# Altium PCB blueduino-r2.PcbDoc
Units mm, origin at the board's own origin, x right, y up, seen from the top; angles counter-clockwise.
Board outline 40.15 x 18.15 mm, 2 copper layers (Top Layer, Bottom Layer); 26 components, 55 nets, 147 pads, 59 vias.
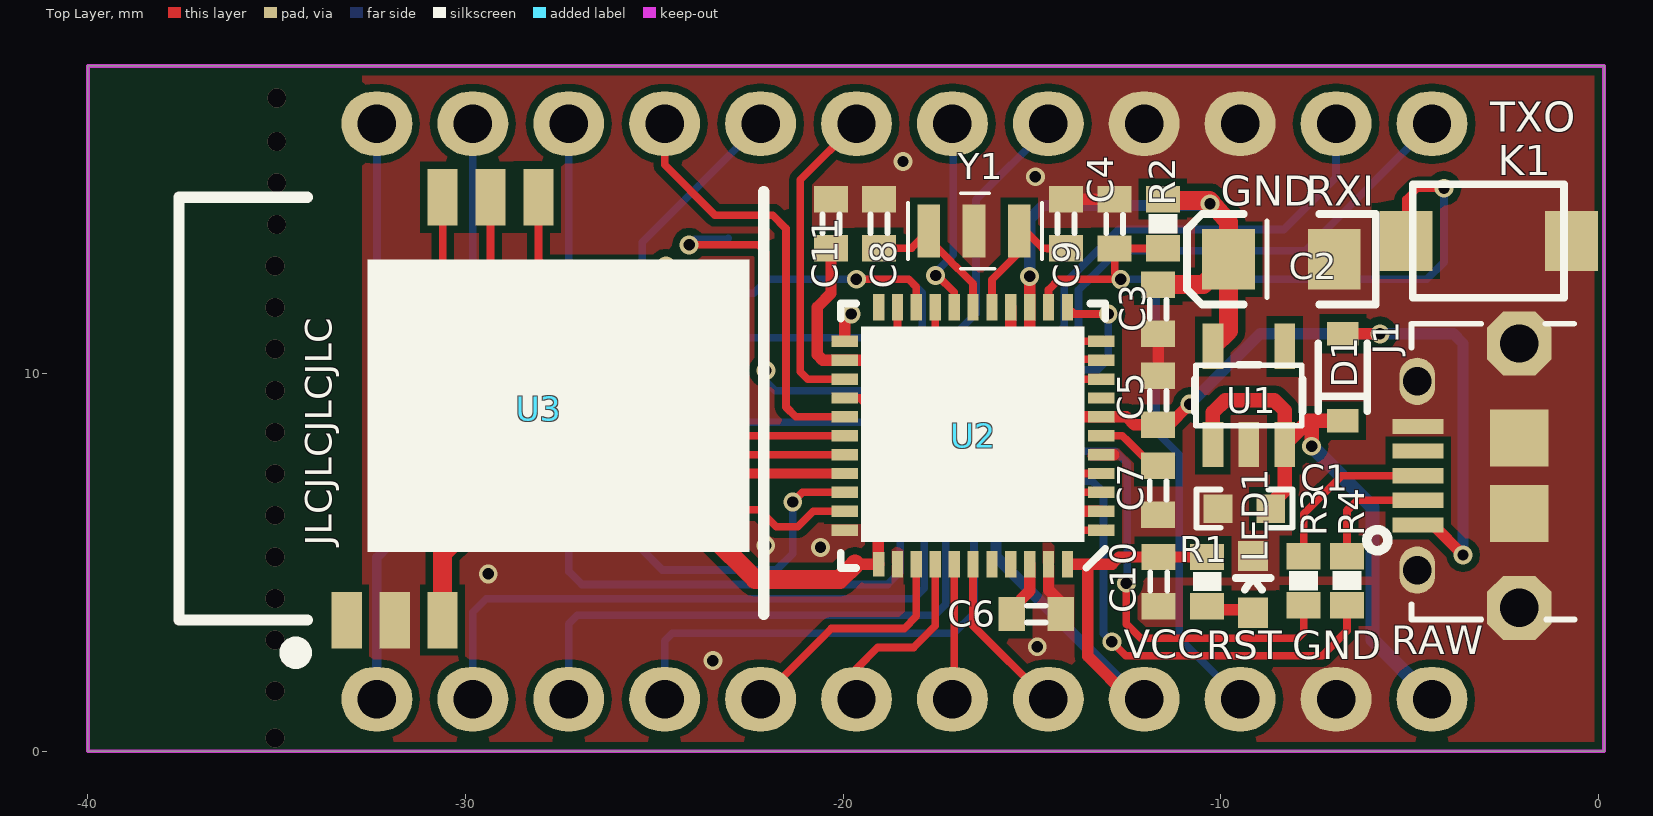
[diagram p0: Top Layer view]
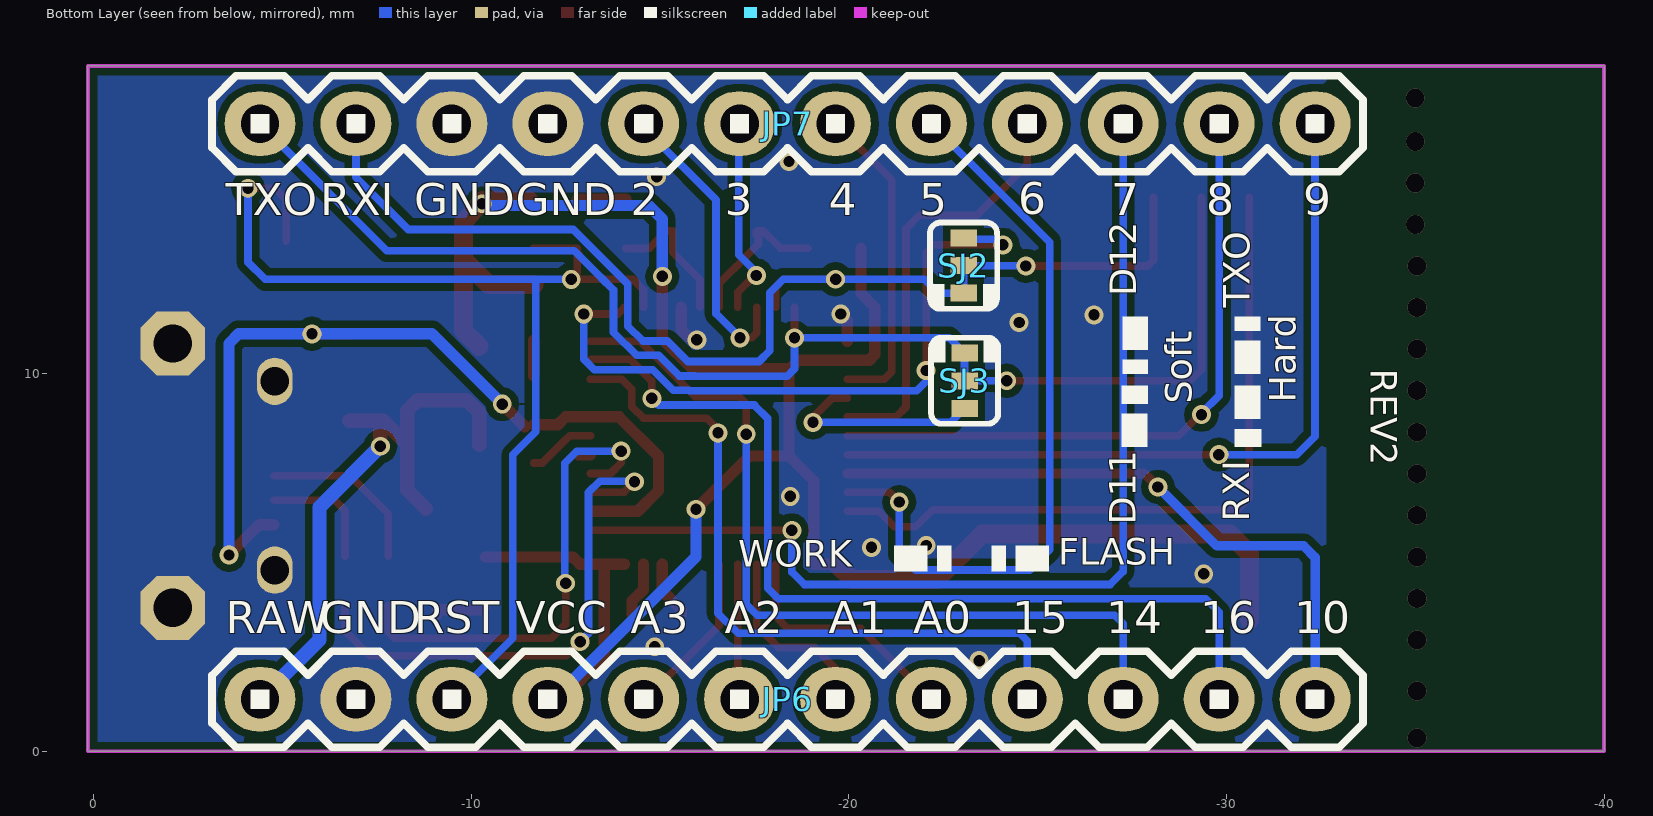
[diagram p1: Bottom Layer view, seen from below]

## Layer stack, top to bottom
Top Layer: signal copper 0.0356
Dielectric: dielectric 0.32, FR-4, Dk 4.8
Bottom Layer: signal copper 0.0356

## Board outline
-40,0 -40,18.15 0.15,18.15 0.15,0

## Design rules (kind name [scope] priority, off if disabled: settings)
Clearance Clearance_gnd [InNet('GND')] p1: gap=0.2
Clearance [All] p2: gap=0.178
DiffPairsRouting [All] p1: maxlimit=0.254 minlimit=0.254 mostfreqgap=0.254 maxuncoupledlength=12.7
FabricationTestPointUsage TestPointUsage [All] p1: valid=0 allowmultiple=FALSE
FabricationTestpoint Testpoint [All] p1: side=3 testpointundercomponent=TRUE minsize=1.016 maxsize=2.54 preferedsize=1.524 minholesize=0 maxholesize=1.016 preferedholesize=0.813 testpointgrid=0.025 allowsidetop=TRUE allowsidebottom=TRUE usegrid=TRUE gridtolerance=0
HoleSize [All] p1: absolutevalues=TRUE maxlimit=2.54 minlimit=0.3 maxpercent=80.000 minpercent=20.000
HoleToHoleClearance [All] p1: gap=0.152 allowstackedmicrovias=TRUE
PlaneConnect [All] p1: planeconnectstyle=Direct reliefexpansion=0.508 reliefentries=4 reliefconductorwidth=0.254 reliefairgap=0.254
PolygonConnect [All] p1: connectstyle=Direct reliefconductorwidth=0.254 reliefentries=4 polygonreliefangle="90 Angle"
RoutingVias [All] p1: holewidth=0.3 width=0.5 viastyle="Through Hole" minholewidth=0.3 minwidth=0.5 maxholewidth=0.711 maxwidth=1.27
SilkscreenOverComponentPads [IsPad] p1: minsilkscreentomaskgap=0.254
SolderMaskExpansion [All] p1: expansion=0
Width [All] p1: maxlimit=0.5 minlimit=0.09 preferedwidth=0.203 bottomlayer_minwidth=0.203 minimp=50.000000 maximp=50.000000 favimp=50.000000
21 further rules are at their usual default settings.

## Classes and differential pairs
differential pair USB_Data: +D+ -D-

## Components (designator, comment, footprint, x,y, rotation, side; value= is the part's Value field where it differs from the comment)
C1 "10uF" 0603C -9.373,6.426 r180 top
C2 "10uF" EIA3216 -8.395,13.03 r180 top (schematic designator C13)
C3 "0.1uF" 0402-CAP -11.659,11.709 r90 top (schematic designator C7)
C4 "0.1UF" 0402-CAP -12.812,13.966 r270 top (schematic designator C10)
C5 "1uF" 0402-CAP -11.659,9.296 r270 top (schematic designator C6)
C6 "0.1uF" 0402-CAP -14.884,3.632 r180 top (schematic designator C1)
C7 "1uF" 0402-CAP -11.659,6.909 r90 top (schematic designator C5)
C8 "22pF" 0402-CAP -19.05,13.97 r90 top (schematic designator C2)
C9 "22pF" 0402-CAP -14.097,13.97 r90 top (schematic designator C4)
C10 "1uF" 0402-CAP -11.643,4.496 r270 top
C11 "0.1uF" 0402-CAP -20.32,13.97 r270 top (schematic designator C3)
D1 "B5819WS" SOD-323 -6.769,9.906 r90 top (schematic designator D2)
J1 "Comment" FCI_10118194-0001 -3.696,7.298 r90 top
JP6 "*" 1X12 -4.407,1.38 r180 bottom locked
JP7 "*" 1X12 -32.347,16.62 r0 bottom locked
LED1 "Red" LED-0603 -9.144,4.42 r0 top
R1 "1K" 0402-RES -10.363,4.496 r90 top (schematic designator R11)
R2 "10K" 0402-RES -11.532,13.97 r90 top
R3 "22" 0402-RES -7.807,4.517 r90 top (schematic designator R5)
R4 "22" 0402-RES -6.657,4.517 r90 top (schematic designator R7)
SJ2 "SW-SPDT" "SJ_3 - S" -23.039,12.861 r90 bottom
SJ3 "SW-SPDT" "SJ_3 - S" -23.064,9.813 r270 bottom
U1 "MIC5219-3.3BM5" SOT23-5 -9.258,9.423 r0 top (schematic designator U2)
U2 "ATMEGA32U4" QFN-44-NOPAD -16.561,8.357 r180 top (schematic designator U3)
U3 "AB01" CC2540-MINI -28.067,9.075 r180 top
Y1 "8Mhz" OSCCC250X320X80-4L -16.434,12.929 r180 top

## Footprints (in the part's own frame and the unit in brackets; to place one, negate y for a bottom-side part, rotate by r counter-clockwise, add the part's x,y. Pads: shape width x height; smd on the part's side, far side on the other; paste and mask are expansions set on the pad)
1X12 [mm]
  oval 1.88x1.7 hole 1.016: 1(0,0) 2(2.54,0) 3(5.08,0) 4(7.62,0) 5(10.16,0) 6(12.7,0) 7(15.24,0) 8(17.78,0) 9(20.32,0) 10(22.86,0) 11(25.4,0) 12(27.94,0)
  silkscreen extent -1.27,-1.27 29.21,1.27
0402-CAP [mm]
  rect 0.7x0.9 smd: 1(-0.65,0) 2(0.65,0)
  silkscreen extent -0.25,-0.22 0.25,0.22
0402-RES [mm]
  rect 0.7x0.9 smd: 1(-0.65,0) 2(0.65,0)
  silkscreen extent -0.25,-0.39 0.25,0.38
0603C [mil]
  rect 30x30 smd: 1(27.5,0) 2(-27.5,0)
  silkscreen extent -50,-20 50,20
CC2540-MINI [mm]
  rect 0.8x1.5 smd: 1(5.08,5.6) 2(3.81,5.6) 3(2.54,5.6) 14(0,-5.6) 15(1.27,-5.6)
  rect 0.8x1.5 on Top Overlay: 4(1.27,5.6) 5(0,5.6) 6(-1.27,5.6) 7(-2.54,5.6) 8(-3.81,5.6) 9(-5.08,5.6) 10(-5.08,-5.6) 11(-3.81,-5.6) 12(-2.54,-5.6) 13(-1.27,-5.6) 17(3.81,-5.6) 18(5.08,-5.6)
  silkscreen extent -5.96,-5.75 9.52,6.64
EIA3216 [mm]
  rect 1.4x1.6 smd: A(1.4,0) C(-1.4,0)
  silkscreen extent -2.5,-1.2 2.5,1.2
FCI_10118194-0001 [mm] "FCI_10118194-0001"
  rect 0.4x1.35 smd: 1(-1.3,1.077) 2(-0.65,1.077) 3(0,1.077) 4(0.65,1.077) 5(1.3,1.077)
  oval 1.25x0.95 hole 0.76: G1(-2.5,1.102) G2(2.5,1.102)
  oct 1.7x1.7 hole 1.016: G3(-3.5,-1.598) G6(3.5,-1.598)
  rect 1.5x1.55 smd: G4(-1,-1.598) G5(1,-1.598)
  silkscreen extent -3.81,-3.06 4.03,2.44
LED-0603 [mm]
  rect 0.8x0.8 smd: A(0,-0.75) C(0,0.75)
  silkscreen extent -0.46,-0.14 0.46,0.17
OSCCC250X320X80-4L [mm] "OSCCC250X320X80-4L"
  rect 0.6x1.4 smd paste-0.055 mask+0.075: 1(-1.1,-0.85) 2(0.1,-0.85) 3(1.3,-0.85)
  silkscreen extent -1.7,-1.85 1.85,0.15
QFN-44-NOPAD [mm]
  rect 0.7x0.3 smd mask+0.05: 1(-3.4,2.5) 2(-3.4,2) 3(-3.4,1.5) 4(-3.4,1) 5(-3.4,0.5) 6(-3.4,0) 7(-3.4,-0.5) 8(-3.4,-1) 9(-3.4,-1.5) 10(-3.4,-2) 11(-3.4,-2.5) 23(3.4,-2.5) 24(3.4,-2) 25(3.4,-1.5) 26(3.4,-1) 27(3.4,-0.5) 28(3.4,0) 29(3.4,0.5) 30(3.4,1) 31(3.4,1.5) 33(3.4,2.5)
  rect 0.3x0.7 smd mask+0.05: 12(-2.5,-3.4) 13(-2,-3.4) 14(-1.5,-3.4) 15(-1,-3.4) 16(-0.5,-3.4) 17(0,-3.4) 18(0.5,-3.4) 19(1,-3.4) 20(1.5,-3.4) 21(2,-3.4) 22(2.5,-3.4) 35(2,3.4) 36(1.5,3.4) 37(1,3.4) 38(0.5,3.4) 39(0,3.4) 40(-0.5,3.4) 41(-1,3.4) 42(-1.5,3.4) 43(-2,3.4) 44(-2.5,3.4)
  rect 0.7x0.3 smd paste+0 mask+0.05: 32(3.4,2)
  rect 0.3x0.65 smd mask+0.05: 34(2.5,3.4)
  silkscreen extent -3.5,-3.5 3.5,3.5
"SJ_3 - S" [mm]
  rect 0.45x0.7 smd: 1(-0.73,0) 2(0,0) 3(0.73,0)
  silkscreen extent -1.15,-0.89 1.14,0.89
SOD-323 [mm]
  rect 0.63x0.83 smd: 1(-1.15,0) 2(1.15,0)
  silkscreen extent -0.9,-0.65 0.9,0.65
SOT23-5 [mm]
  rect 0.55x1.2 smd: 1(-0.95,-1.3) 2(0,-1.3) 3(0.95,-1.3) 4(0.95,1.3) 5(-0.95,1.3)
  silkscreen extent -1.42,-0.8 1.42,0.81

## Part data
C2: library part CAP_POL1206
C3 C4 C5 C6 C7 C8 C9 C10 C11: library part CAP0402-CAP
D1: library part DIODESOD
JP6 JP7: library part M12PTH
LED1: library part LED0603
R1 R2 R3 R4: library part RESISTOR0402-RES
SJ2 SJ3: "SPDT Subminiature Toggle Switch, Right Angle Mounting, Vertical Actuation"
U1: library part V_REG_LDOSMD
U2: library part ATMEGA32U4QFN2

## Free pads (board coordinates)
  rect 0.8x1.5 smd: 0(-30.607,14.675)
  rect 1.4x1.6 smd: 2(-5.1,13.513) 2(-0.711,13.513)

## Via types
v1: diameter 0.5, hole 0.3, Top Layer to Bottom Layer, 43 vias
v2: diameter 0.5, hole 0.5, Top Layer to Bottom Layer, 16 vias

## Nets (pads, with @x,y where several pads share a name; then routed paths per layer and width w, separated by ;. In a path a pad name is that pad's centre, name@x,y a point inside that pad or via, vN(x,y) a via of type N, cw(c..) or ccw(c..) an arc to the next point about the centre after c; other vN are vias at no path point)
A0: JP6.8 U2.36 | length 6.4
  Top Layer w0.203: JP6.8 -20.317,3.25 -18.384,3.25 -18.061,3.573 U2.36
A1: JP6.7 U2.37 | length 5
  Top Layer w0.203: JP6.7 -19.647,2.187 -19.084,2.75 -18.134,2.75 -17.561,3.323 U2.37
A2: JP6.6 U2.38 | length 3.8
  Top Layer w0.203: JP6.6 -17.061,1.426 U2.38
  Bottom Layer w0.203: JP6.6 JP6.6@-17.107,1.577
A3: JP6.5 U2.39 | length 4.7
  Top Layer w0.203: U2.39 -16.561,3.327 -14.614,1.38 JP6.5
  Bottom Layer w0.203: JP6.5 JP6.5@-14.567,1.667
A4: U2.40
A5: U2.41
AREF: C6.2 U2.42 | length 1.5
  Top Layer w0.3: C6.2@-15.56,3.632 -15.56,3.751 -15.061,4.25 U2.42
D2: JP7.8 U2.19 | length 7.9
  Top Layer w0.203: U2.19 -17.561,11.084 -17.424,10.947 v1(-17.12,10.947)
  Bottom Layer w0.203: v1(-17.12,10.947) -16.484,11.583 -16.484,14.6 -14.567,16.517 JP7.8
D3: JP7.7 U2.18 | length 5.5
  Top Layer w0.203: v1@-17.654,12.58 v1@-17.534,12.58 ; v1(-17.55,12.6) v1@-17.544,12.6 ; U2.18 -17.061,12.152 v1@-17.489,12.58 ; v1@-17.544,12.6 -17.534,12.61 v1@-17.534,12.6 ; v1@-17.544,12.6 v1@-17.534,12.6 ; v1@-17.534,12.58 v1@-17.534,12.6 ; v1@-17.534,12.58 v1@-17.489,12.58 ; v1@-17.534,12.6 -17.509,12.6 v1@-17.489,12.58
  Bottom Layer w0.203: v1@-17.534,12.58 -17.534,12.7 -17.084,13.15 -17.084,16.597 JP7.7
D4: JP7.6 U2.25 | length 8.4
  Top Layer w0.203: U2.25 -20.94,9.856 -21.133,10.049 -21.133,11.17 -21.133,15.134 JP7.6
D5: JP7.5 U2.31 | length 19.9
  Top Layer w0.203: v1@-21.384,6.55 v1(-21.334,6.6) -21.077,6.857 U2.31
  Bottom Layer w0.203: JP7.5 -25.324,13.483 -25.324,5.334 -24.79,4.801 -21.768,4.801 -21.334,5.235 v1(-21.334,6.6)
D6: JP7.4 U2.27 | length 12.1
  Top Layer w0.203: JP7.4@-24.727,16.507 JP7.4 ; JP7.4@-24.659,16.688 JP7.4 ; JP7.4@-24.189,16.62 JP7.4 ; U2.27 -21.252,8.856 -21.514,9.119 -21.514,13.843 -21.869,14.199 -23.393,14.199 -24.727,15.532 JP7.4
D7: JP7.3 U2.1 | length 27.3
  Top Layer w0.203: v1(-18.49,5.85) U2.1
  Bottom Layer w0.203: JP7.3 -27.267,4.763 -26.924,4.42 -18.821,4.42 -18.49,4.751 v1(-18.49,5.85)
D8: JP7.2 U2.28 | length 17.5
  Top Layer w0.203: v1@-29.318,8.934 -28.74,8.356 U2.28
  Bottom Layer w0.203: JP7.2 -29.807,9.423 v1@-29.318,8.934
  other v1: -29.337,8.915
D9: JP7.1 U2.29 | length 21
  Top Layer w0.203: JP7.1 JP7.1@-32.259,16.62 ; v1(-29.8,7.857) U2.29
  Bottom Layer w0.203: JP7.1 -32.347,8.347 -31.857,7.857 v1(-29.8,7.857)
D10: JP6.12 U2.30 | length 17.2
  Top Layer w0.254: JP6.12 JP6.12@-32.223,1.38 ; v1(-28.184,7) -27.827,7.357 U2.30
  Bottom Layer w0.254: JP6.12 -32.347,5.137 -32.04,5.444 -29.74,5.444 v1(-28.184,7)
D11: SJ2.3 U2.12 | length 18.2
  Top Layer w0.203: v1(-24.079,13.411) -22.25,13.411 -22.047,13.208 v1(-22.047,10.084) ; U2.12 -13.887,11.582 v1@-13.03,11.582
  Bottom Layer w0.203: v1@-24.028,13.411 v1(-24.079,13.411) -23.927,13.564 -23.066,13.564 SJ2.3 ; -22.047,9.804 -21.793,9.55 -15.773,9.55 ; -15.764,9.56 -15.352,9.56 -14.807,10.105 -13.263,10.105 -12.979,10.389 v1(-12.979,11.582)
D12: SJ3.3 U2.26 | length 5.4
  Top Layer w0.203: U2.26 -19.566,9.356 -19.05,8.841 v1(-19.05,8.712)
  Bottom Layer w0.203: SJ3.3 -22.694,8.712 v1(-19.05,8.712)
D13: pad.0 U2.32 | length 19.1
  Top Layer w0.203: pad.0 -30.607,6.707 -30.3,6.4 -22.22,6.4 -21.77,5.95 -21.2,5.95 -20.793,6.357 U2.32
D17: U2.8
D+: R3.1 U2.4 | length 12.9
  Top Layer w0.203: v1(-13.97,7.95) -13.97,7.638 -13.688,7.357 U2.4 ; v1(-12.5,4.45) -12.5,3.373 -12.118,2.99 -7.967,2.99 -7.807,3.15 R3.1
  Bottom Layer w0.203: v1@-14.021,7.95 -14.021,8.001 v1(-13.97,7.95) -12.8,7.95 -12.478,7.628 -12.478,6.944 -12.478,6.85 v1@-12.478,4.38
D-: R4.1 U2.3 | length 14
  Top Layer w0.203: v1(-14.326,7.137) -14.045,6.857 U2.3 ; v1(-12.884,2.9) -12.515,2.532 -7.318,2.532 -6.657,3.193 R4.1
  Bottom Layer w0.203: v1(-14.326,7.137) -14.288,7.1 -14.238,7.15 -13.4,7.15 -13.106,6.856 -13.106,3.122 v1(-12.884,2.9)
GND: C1.1 C2.C C3.1 C4.1 C5.1 C6.1 C7.1 C8.2 C9.2 C10.2 C11.1 J1.5 J1.G1 J1.G2 J1.G3 J1.G4 J1.G5 J1.G6 JP6.2 JP7.9 JP7.10 LED1.C pad.2@-0.711,13.513 U1.2 U2.5 U2.15 U2.23 U2.33 U2.35 U2.43 U3.2 Y1.2 | length 5.9
  Top Layer w0.3: U2.23 -19.961,11.408 v1(-19.787,11.582) ; v1@-15.977,10.922 -15.799,10.922 -15.561,11.16 U2.15 ; U2.43 -14.561,4.277 -14.26,3.976 C6.1@-14.26,3.632 ; C9.2@-14.097,14.616 C4.1 ; U2.5 U2.5@-12.836,7.857 ; C5.1 C3.1@-11.659,10.882
  other v1: -23.45,2.4 -14.859,2.769 -29.4,4.7 -20.6,5.4 -22.05,5.45 -18.45,6.75 -15.977,10.897 -24.511,11.354 -26.492,11.557 -14.91,15.215 -18.415,15.621
GPIO0: 
GPIO2: 
GPIO12: 
GPIO13: 
GPIO15: 
MISO: JP6.10 U2.11 | length 22.3
  Top Layer w0.203: v1(-17.284,8.4) -17.284,9.2 -17.086,9.398 -15.926,9.398 -15.541,9.783 -15.541,9.795 -14.479,10.857 U2.11
  Bottom Layer w0.203: JP6.10 -27.267,3.378 -27.038,3.607 -17.577,3.607 -17.284,3.9 v1(-17.284,8.4)
MOSI: JP6.11 U2.10 | length 24.6
  Top Layer w0.203: v1(-14.783,9.347) -14.783,9.804 -14.208,10.379 -13.184,10.379 U2.10
  Bottom Layer w0.203: JP6.11 -29.807,3.683 -29.451,4.039 -18.136,4.039 -17.856,4.318 -17.856,8.814 -17.501,9.169 -15.926,9.169 -14.961,9.169 v1(-14.783,9.347)
NetC2_1: C8.1 U2.17 Y1.3 | length 4.2
  Top Layer w0.203: C8.1@-18.923,13.32 -18.192,13.32 Y1.3 -17.672,13.779 Y1.3@-17.607,13.713 ; Y1.3@-17.607,13.779 Y1.3@-17.607,13.713 ; Y1.3@-17.553,13.68 -17.553,13.767 Y1.3@-17.607,13.713 ; U2.17 -16.561,12.386 -16.952,12.777 -16.959,12.777 -17.135,12.954 -17.135,12.96 -17.607,13.432 Y1.3@-17.607,13.713
NetC4_1: C9.1 U2.16 Y1.1 | length 4.2
  Top Layer w0.203: U2.16 -16.061,12.489 -15.334,13.216 Y1.1 -15.179,13.779 -14.72,13.32 C9.1 ; -14.592,13.316 C9.1@-14.097,13.316
NetC5_2: C7.2 U2.6 | length 1.8
  Top Layer w0.203: U2.6 -12.607,8.357 -12.468,8.217 ; -12.467,8.217 -11.885,7.635 C7.2@-11.659,7.635
NetD1_C: 
NetD2_2: 
NetD3_C: 
NetLED1_A: LED1.A R1.1 | length 1.4
  Top Layer w0.3: R1.1 -10.267,3.75 -9.134,3.75 -9.093,3.709 LED1.A@-9.093,3.619
NetR3_2: J1.3 R3.2 | length 4.6
  Top Layer w0.203: R3.2 -7.807,6.293 -6.802,7.298 J1.3
NetR4_2: J1.2 R4.2 | length 3.2
  Top Layer w0.203: R4.2 -6.657,6.377 -6.386,6.648 J1.2
NetR6_1: U2.22
NetR8_1: SJ3.2 U3.15 | length 11.7
  Top Layer w0.203: U3.15 -29.337,10.109 -29.041,9.813 v1(-24.181,9.813)
  Bottom Layer w0.203: v1(-24.181,9.813) SJ3.2 -23.064,10.543
NetSJ2_2: SJ2.2 U3.14 | length 7.5
  Top Layer w0.203: U3.14 -28.067,13.005 -27.915,12.852 v1(-24.689,12.852)
  Bottom Layer w0.203: v1@-24.689,12.861 SJ2.2 -23.039,12.131
P0.2: 
P0.3: 
P1.2: 
RAW: C1.2 D1.1 JP6.1 U1.1 U1.3 | length 16.3
  Top Layer w0.381: U1.1 -10.208,8.975 -9.884,9.3 -8.584,9.3 -8.309,9.025 U1.3 ; C1.2@-8.801,6.426 -8.309,6.919 U1.3 ; v1(-7.595,8.077) -7.595,8.675 -7.676,8.756 ; D1.1 -7.676,8.756 ; U1.3 -7.676,8.756
  Bottom Layer w0.381: v1(-7.595,8.077) -5.984,6.466 -5.984,2.957 JP6.1
RESET: C4.2 JP6.3 pad.2@-5.1,13.513 R2.1 U2.13 | length 29.4
  Top Layer w0.203: U2.13 -14.561,12.223 -14.284,12.5 v1@-12.652,12.5 ; C4.2@-12.852,13.148 C4.2@-12.812,13.189 ; v1@-12.812,12.659 C4.2@-12.812,13.189 ; R2.1@-11.643,13.316 C4.2 C4.2@-12.812,13.189 ; pad.2@-5.1,13.513 -5.1,14.611 -4.801,14.91 v1(-4.089,14.91)
  Bottom Layer w0.203: v1(-12.649,12.497) -11.7,12.497 ; JP6.3 -11.1,2.993 -11.1,7.849 -11.709,8.458 -11.709,12.487 -11.7,12.497 ; v1(-4.089,14.91) -4.089,12.954 -4.547,12.497 -11.7,12.497
REST1: 
RXI: JP7.11 SJ2.1 U2.20 | length 24.4
  Top Layer w0.203: v1(-19.65,12.5) -18.266,12.5 -18.061,12.295 U2.20
  Bottom Layer w0.203: SJ2.1 -22.369,12.131 -22,12.5 v1(-19.65,12.5) -18.266,12.5 -17.907,12.141 -17.907,10.607 -17.622,10.322 -15.739,10.322 -15.193,10.867 -14.538,10.867 -14.148,11.258 -14.148,12.375 -12.705,13.818 -8.331,13.818 -6.947,15.202 JP7.11
SCK: JP6.9 U2.9 | length 19.1
  Top Layer w0.203: v1(-16.535,8.433) -16.535,8.515 -16.232,8.818 -14.564,8.818 -14.253,9.128 -14.253,9.585 -13.989,9.85 -13.168,9.85 U2.9
  Bottom Layer w0.203: JP6.9 -24.727,2.923 -24.526,3.124 -17.069,3.124 -16.534,3.659 v1(-16.535,8.433) v1(-16.535,8.433)
TXO: JP7.12 SJ3.1 U2.21 | length 26.2
  Top Layer w0.203: v1(-18.561,10.947) U2.21
  Bottom Layer w0.203: SJ3.1 -22.66,10.947 v1(-18.561,10.947) -18.561,10.128 -18.364,9.931 -15.931,9.931 -15.922,9.941 -15.51,9.941 -14.965,10.486 -14.381,10.486 -13.767,11.1 -13.767,12.217 ; -13.437,12.548 -13.767,12.217 ; -8.052,13.259 -9.855,13.259 ; JP7.12 -7.768,13.259 -9.855,13.259 ; -13.767,12.217 -12.725,13.259 -9.855,13.259
U-: 
UVCC: C5.2 D1.2 J1.1 U2.2 U2.7 | length 23.8
  Top Layer w0.3: U2.2 -14.408,6.357 -14.96,6.909 -14.96,7.814 -13.917,8.857 U2.7 -12.5,8.857 -12.29,8.646 C5.2 ; C5.2@-11.42,8.596 v1(-10.82,9.195) ; D1.2 v1(-5.784,11.056) ; J1.1 -4.382,5.998 v1(-3.584,5.2)
  Bottom Layer w0.3: v1(-10.82,9.195) -8.959,11.056 v1(-5.784,11.056) -3.84,11.056 -3.584,10.8 v1(-3.584,5.2)
VCC: C2.A C3.2 C10.1 C11.2 JP6.4 R1.2 R2.2 U1.5 U2.14 U2.24 U2.34 U2.44 U3.3 | length 62.5
  Top Layer w0.3: C11.2 -20.32,12.13 -20.684,11.766 -20.684,10.5 -20.54,10.357 U2.24 -18.669,10.357 -18.447,10.135 -18.415,10.135 ; -19.684,4.957 U2.34 -19.068,4.964 -19.068,7.17 -18.416,7.822 -17.366,7.822 v1(-15.954,6.41) ; -18.415,7.823 -18.415,10.135 ; v1(-15.061,12.577) U2.14 -15.061,10.923 -15.85,10.135 -18.415,10.135 ; U2.44 -13.584,4.956 ; JP6.4 -12.384,1.38 -13.524,2.52 -13.524,4.896 -13.584,4.956 ; R1.2 C10.1 -12.688,5.146 -12.877,4.956 -13.584,4.956 ; C2.A@-9.817,13.052 C2.A
  Top Layer w0.5: U3.3 -30.607,5.243 -30.1,5.75 -23.532,5.75 -22.332,4.55 -20.09,4.55 -19.684,4.957 ; C3.2 -10.466,12.359 C2.A ; R2.2@-11.532,14.591 -10.298,14.591 -10.247,14.532 -9.795,14.011 C2.A ; U1.5 -9.795,11.137 C2.A
  Bottom Layer w0.3: v1(-15.954,6.41) -15.954,5.153 -12.181,1.38 JP6.4 ; v1(-15.061,12.577) -15.061,14.098 -14.707,14.453 -10.331,14.453 v1(-10.284,14.5)
VCC33: 
pads on no net: J1.4 U1.4 U3.1 U3.4 U3.5 U3.6 U3.7 U3.8 U3.9 U3.10 U3.11 U3.12 U3.13 U3.17 U3.18
copper on no net:
  other v2: -35.05,0.35 -35.05,1.6 -35.05,2.95 -35.05,4.05 -35.05,5.15 -35.05,6.25 -35.05,7.35 -35.05,8.45 -35.05,9.55 -35.05,10.65 -35.05,11.75 -35.05,12.85 -35,13.95 -35,15.05 -35,16.15 -35,17.3

## Polygon pours and split planes (outlines as drawn)
GND on Bottom Layer "Top Layer-No Net" (solid, remove dead copper, pour order 1000): -32.639,0.025 -0.024,0.025 0,0 0,18.15 -32.639,18.15
GND on Top Layer "Top Layer-No Net" (solid, pour order 1001): -32.739,18.15 0,18.15 0,0 -32.741,0 -32.741,18.149 -32.739,18.15

## Keep-outs
Keep-Out Layer:
  the board outline again, w0.1

## Other copper
Bottom Layer:
  region: -14.415,6.511 -14.418,6.508 -14.415,6.511

## Silkscreen, mask and mechanical layers (free items; w line width, h text height)
Top Overlay:
  region: -13.614,5.537 -13.614,11.252 -19.533,11.252 -19.533,5.537
  lines w0.2: -4.911,12.013 -4.911,15.013 -0.911,15.013 -0.911,12.013 -4.911,12.013
  text "TXO" at -2.87,16.408 h0.79
  text "K1" at -2.668,15.248 h0.79
  text "GND" at -10.008,14.453 h0.79
  text "RXI" at -7.747,14.453 h0.79
  text "JLCJLCJLCJLC" at -33.3,5.45 h1.2 r90
  text "RAW" at -5.486,2.565 h0.75
  text "VCC" at -12.573,2.464 h0.75
  text "RST" at -10.389,2.438 h0.75
  text "GND" at -8.103,2.438 h0.75
Bottom Overlay:
  rectangle: -22.72,4.763 -22.339,5.449
  region: -21.196,5.449 -22.085,5.449 -22.085,4.763 -21.196,4.763
  region: -23.781,5.447 -24.162,5.447 -24.162,4.762 -23.781,4.762
  rectangle: -25.305,4.762 -24.416,5.447
  region: -27.293,8.261 -27.293,8.896 -27.801,8.896 -27.801,8.261
  region: -30.214,11.132 -30.214,11.513 -30.9,11.513 -30.9,11.132
  region: -30.214,10.065 -30.214,10.878 -30.9,10.878 -30.9,10.065
  region: -30.9,9.684 -30.9,8.795 -30.214,8.795 -30.214,9.684
  region: -30.925,8.541 -30.925,8.058 -30.214,8.058 -30.214,8.541
  region: -30.9,10.878 -30.9,9.989 -30.214,9.989 -30.214,10.878
  region: -27.928,9.684 -27.928,9.201 -27.217,9.201 -27.217,9.684
  region: -27.903,8.947 -27.903,8.058 -27.217,8.058 -27.217,8.947
  region: -27.928,11.513 -27.928,10.624 -27.242,10.624 -27.242,11.513
  region: -27.242,9.989 -27.242,10.37 -27.928,10.37 -27.928,9.989
  text "6" at -24.486,14.224 h0.85
  text "9" at -32.029,14.199 h0.85
  text "8" at -29.464,14.199 h0.85
  text "7" at -26.949,14.199 h0.85
  text "5" at -21.869,14.199 h0.85
  text "4" at -19.462,14.199 h0.85
  text "3" at -16.719,14.199 h0.85
  text "2" at -14.227,14.199 h0.85
  text "GND" at -11.176,14.199 h0.85
  text "GND" at -8.491,14.199 h0.85
  text "RXI" at -5.998,14.199 h0.85
  text "TXO" at -3.505,14.199 h0.85
  text "D12" at -27.853,12.053 h1.2 r270
  text "TXO" at -30.85,11.75 h1.2 r270
  text "REV2" at -33.579,10.135 h1.2 r90
  text "Hard" at -32.068,9.227 h1.2 r270
  text "Soft" at -29.325,9.201 h1.2 r270
  text "RXI" at -30.838,6.08 h1.2 r270
  text "D11" at -27.84,6.001 h1.2 r270
  text "FLASH" at -25.55,4.7 h1.2
  text "WORK" at -17.072,4.649 h1.2
  text "10" at -31.801,3.124 h0.85
  text "16" at -29.308,3.124 h0.85
  text "14" at -26.815,3.124 h0.85
  text "15" at -24.323,3.124 h0.85
  text "A0" at -21.705,3.124 h0.85
  text "A1" at -19.462,3.124 h0.85
  text "A2" at -16.719,3.124 h0.85
  text "A3" at -14.227,3.124 h0.85
  text "VCC" at -11.176,3.124 h0.85
  text "RST" at -8.491,3.124 h0.85
  text "GND" at -5.998,3.124 h0.85
  text "RAW" at -3.505,3.124 h0.85

## Text inside footprints (layer, text, board x,y; h text height)
J1: Mechanical 16 "3" at -4.773,8.009 h1.78 r90; Mechanical 16 "1" at -4.773,6.709 h1.78 r90; Mechanical 16 "2" at -4.773,7.359 h1.78 r90; Mechanical 16 "5" at -4.773,9.309 h1.78 r90; Mechanical 16 "G2" at -4.613,11.61 h1.78 r90; Mechanical 16 "G1" at -4.669,6.536 h1.78 r90; Mechanical 16 "G6" at -1.841,12.018 h1.78 r90; Mechanical 16 "G3" at -1.95,5.517 h1.78 r90; Mechanical 16 "G5" at -2.098,9.721 h1.78 r90; Mechanical 16 "G4" at -2.098,7.721 h1.78 r90; Mechanical 16 "4" at -4.773,8.659 h1.78 r90; Mechanical 16 "2" at 1.41,7.104 h1.78 r90; Mechanical 16 "7" at 2.888,13.814 h1.78 r90; Mechanical 16 "0.65" at -6.895,9.399 h1.78 r90; Mechanical 16 "5" at -8.899,3.321 h1.78 r90; Mechanical 16 "2.7" at -2.663,13.314 h1.78 r90; Mechanical 16 "2.675" at -2.485,-0.664 h1.78 r90; Mechanical 16 "5.53" at -1.333,16.315 h1.78 r90; Mechanical 16 "8.05" at 5.111,6.266 h1.78 r90
Y1: Mechanical 11 "1" at -15.334,13.859 h0.2 r180; Mechanical 11 "3" at -17.534,12.159 h0.2 r180; Mechanical 11 "4" at -15.334,12.159 h0.2 r180; Mechanical 11 "2" at -17.534,13.859 h0.2 r180